# Altium PCB SensorRotacao.PcbDoc
Units mm, origin at the board's own origin, x right, y up, seen from the top; angles counter-clockwise.
Board outline 55 x 25 mm, 2 copper layers (Top Layer, Bottom Layer), stack 1.671 mm thick; 22 components, 8 nets, 46 pads, 7 vias.
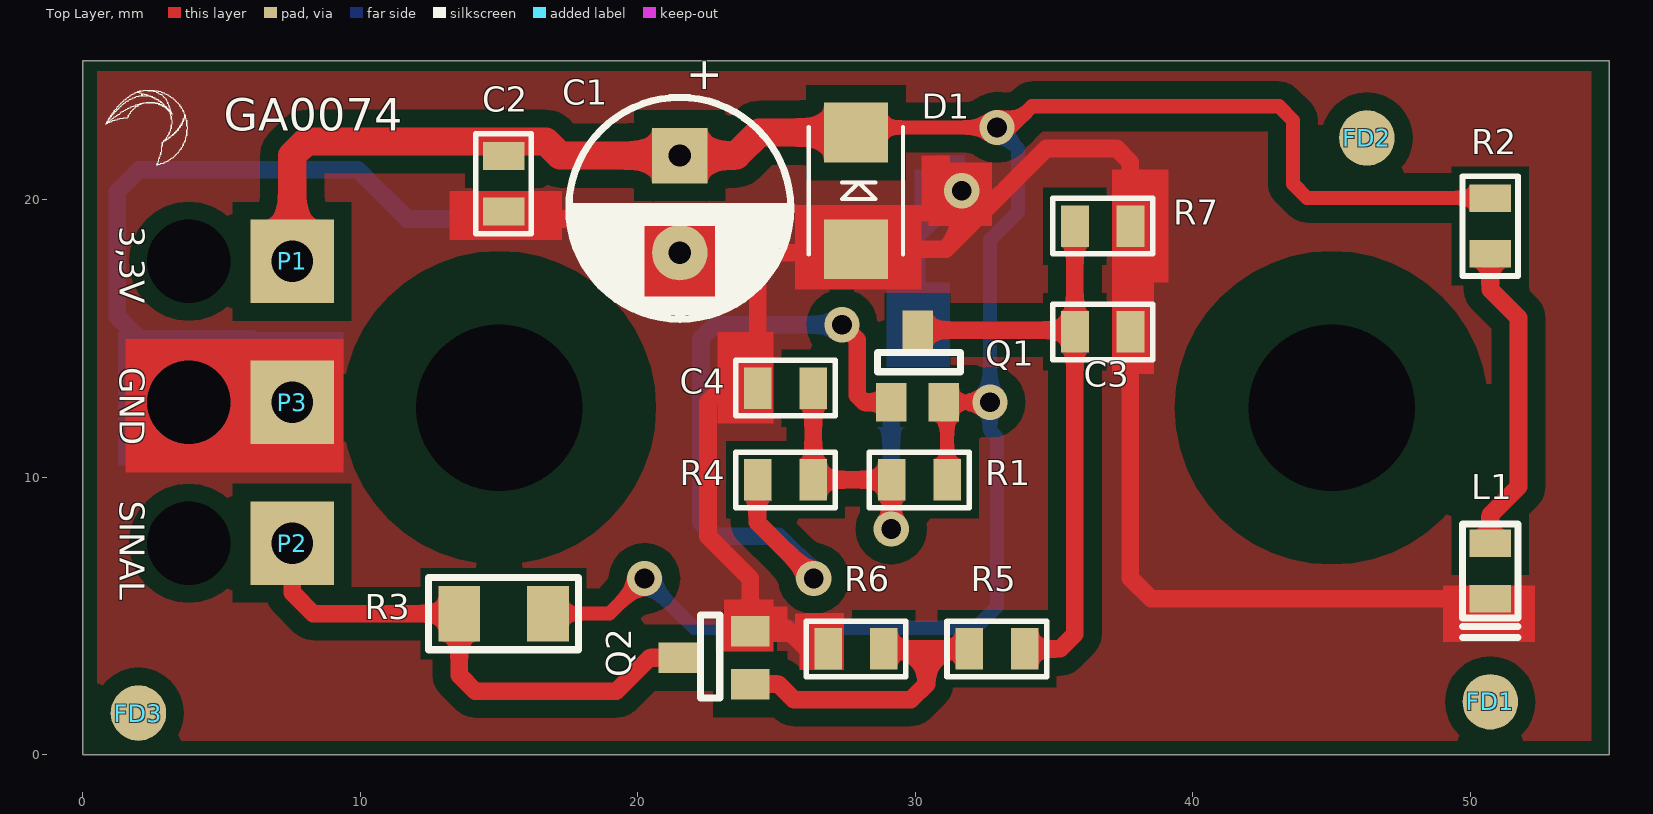
[diagram p0: Top Layer view]
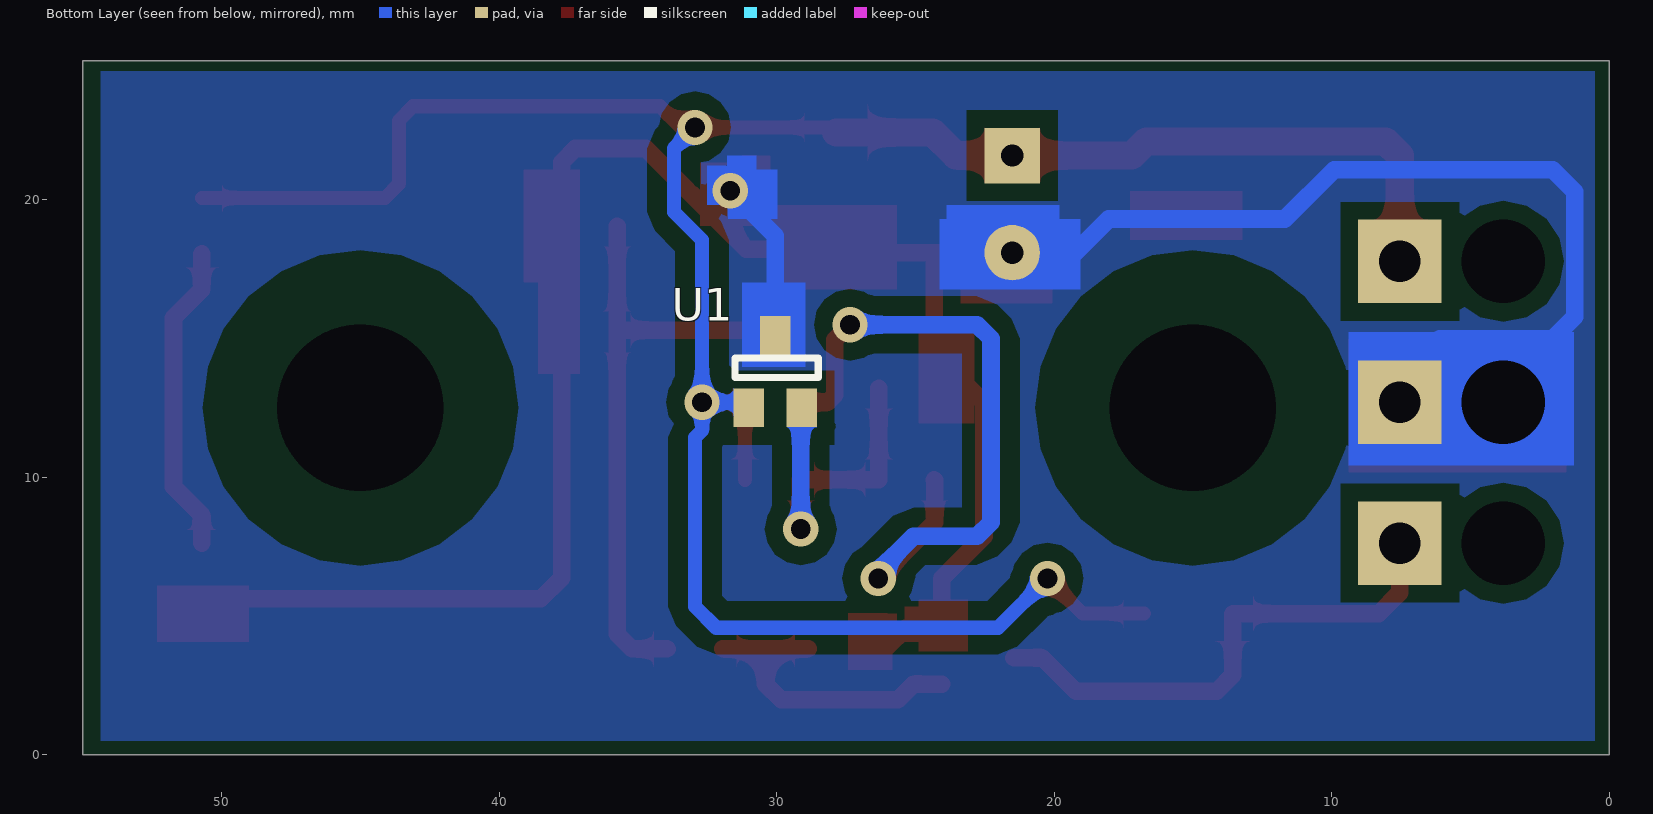
[diagram p1: Bottom Layer view, seen from below]
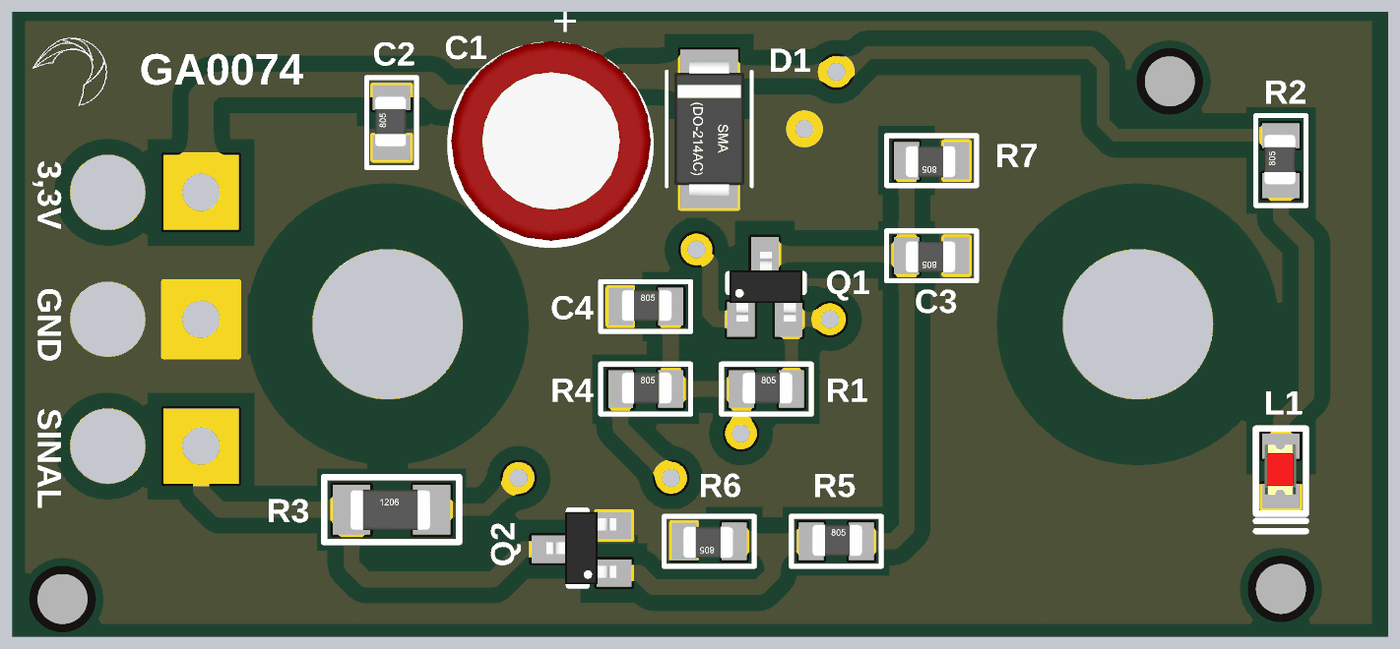
[diagram p2: 3D render of the assembled board from above, using the file's embedded part models]

## Layer stack, top to bottom
Top Solder: solder mask 0.0102, Solder Resist, Dk 3.5
Top Layer: signal copper 0.0356
Dielectric 1: dielectric 1.6, FR-4, Dk 4.8
Bottom Layer: signal copper 0.0356
Bottom Solder: solder mask 0.0102, Solder Resist, Dk 3.5

## Board outline
0,0 0,25 55,25 55,0

## Design rules (kind name [scope] priority, off if disabled: settings)
Clearance [InPolygon] p1: gap=0.635
Clearance Clearance_1 [All] p2: gap=0.762
PolygonConnect [All] p1: connectstyle=Relief reliefconductorwidth=0.254 reliefentries=4 polygonreliefangle="90 Angle" airgapwidth=0.254
RoutingVias [All] p1: holewidth=0.711 width=1.27 viastyle="Through Hole" minholewidth=0.711 minwidth=1.27 maxholewidth=0.711 maxwidth=1.27
SolderMaskExpansion [All] p1: expansion=0.102
UnpouredPolygon [All] p1: allowunpoured=FALSE
Width [All] p1: maxlimit=2.54 minlimit=0.254 preferedwidth=0.508
29 further rules are at their usual default settings.

## Components (designator, comment, footprint, x,y, rotation, side; value= is the part's Value field where it differs from the comment)
C1 "100uF/50V" "CAP POL 8x12mm" 21.51,21.59 r270 top
C2 "100nF/50V-0805" "0805-REVISADO ONDA" 15.16,20.574 r90 top
C3 "470nF/50V-0805" "0805-REVISADO ONDA" 36.75,15.24 r180 top
C4 "100nF/50V-0805" "0805-REVISADO ONDA" 25.32,13.208 r0 top
D1 "SMBJ5.0A" DO-214AA 27.86,20.32 r90 top
FD1 "FID" FIDUCIAL 50.72,1.905 r0 top
FD2 "FID" FIDUCIAL 46.275,22.225 r0 top
FD3 "FID" FIDUCIAL 2,1.5 r0 top
L1 "LED VERMELHO 0603 SMD" "LED 0805 - REVISADO ONDA" 50.72,7.62 r270 top
P1 "PAD" "PAD 3,5" 7.54,17.78 r180 top
P2 "PAD" "PAD 3,5" 7.54,7.62 r90 top
P3 "PAD" "PAD 3,5" 7.54,12.7 r90 top
Q1 "BC856L" "SOT23 - REVISADO ONDA" 29.13,12.7 r0 top
Q2 "BC846L" "SOT23 - REVISADO ONDA" 24.05,2.54 r90 top
R1 "10K-0805-5%" "0805-REVISADO ONDA" 30.146,9.906 r0 top
R2 "1K-0805-5%" "0805-REVISADO ONDA" 50.72,19.05 r90 top
R3 "220R-1206-5%" "1206-REVISADO ONDA" 15.16,5.08 r0 top
R4 "1K-0805-5%" "0805-REVISADO ONDA" 25.32,9.906 r0 top
R5 "1K-0805" "0805-REVISADO ONDA" 32.94,3.81 r0 top
R6 "100K-0805-5%" "0805-REVISADO ONDA" 27.86,3.81 r180 top
R7 "10K-0805-5%" "0805-REVISADO ONDA" 36.75,19.05 r180 top
U1 "A1120" "SOT23 - REVISADO ONDA" 31,12.5 r180 bottom

## Footprints (in the part's own frame and the unit in brackets; to place one, negate y for a bottom-side part, rotate by r counter-clockwise, add the part's x,y. Pads: shape width x height; smd on the part's side, far side on the other; paste and mask are expansions set on the pad)
"0805-REVISADO ONDA" [mm]
  rect 1x1.5 smd: 1(-1,0) 2(1,0)
  silkscreen extent -1.8,-1 1.8,1, body extent -0.96,-0.58 1.04,0.67, height 0.78
"1206-REVISADO ONDA" [mm]
  rect 1.5x2 smd: 1(-1.6,0) 2(1.6,0)
  silkscreen extent -2.7,-1.3 2.7,1.3, body extent -1.65,-0.81 1.55,0.79, height 1
"CAP POL 8x12mm" [mm]
  rect 2x2 hole 0.8: 1(0,0)
  round 2 hole 0.8: 2(3.5,0)
  silkscreen extent -2.1,-4 5.9,4, body extent -2.25,-3.97 5.75,4.03, height 12
DO-214AA [mm] "SMBJ LITTELFUSE"
  rect 2.15x2.3 smd: 1(-2.1,0) 2(2.1,0)
  silkscreen extent -2.3,-1.7 2.3,1.7, body extent -2.75,-1.4 2.75,1.4, height 2.6
FIDUCIAL [mm]
  round 2 smd: 1(0,0)
"LED 0805 - REVISADO ONDA" [mm]
  rect 1x1.5 smd: 1(0,0) 2(2,0)
  silkscreen extent -0.7,-1 3.4,1, body extent -0.07,-0.65 1.95,0.6, height 1.1
"PAD 3,5" [mm]
  rect 3x3 hole 1.5: 1(0,0)
"SOT23 - REVISADO ONDA" [mm]
  rect 1.1x1.4 smd: 1(0,0) 2(1.9,0) 3(0.95,2.6)
  silkscreen extent -0.5,1.1 2.5,1.8, body extent -0.45,-0.1 2.45,2.7, height 1.3

## Part data
C2 C4: library part 100nF/50-0805-NPO
C3: library part 100nF/50-0805-NPO, "100nF/50V-0805"
FD1 FD2 FD3: library part FIDUCIAL
Q2: library part BC846
R3 R5 R6: library part 10K-0805-5%, "10K-0805-5%"

## Free pads (board coordinates)
  round 0 hole 3: ""(3.81,7.62) ""(3.81,12.7) ""(3.81,17.78)
  round 0 hole 6: ""(15,12.5) ""(45,12.5)

## Via types
v1: diameter 1.27, hole 0.711, Top Layer to Bottom Layer, 7 vias

## Nets (pads, with @x,y where several pads share a name; then routed paths per layer and width w, separated by ;. In a path a pad name is that pad's centre, name@x,y a point inside that pad or via, vN(x,y) a via of type N, cw(c..) or ccw(c..) an arc to the next point about the centre after c; other vN are vias at no path point)
3,3V: C1.1 C2.2 D1.2 P1.1 Q1.2 R1.2 R2.2 R3.2 U1.1 | length 93
  Top Layer w0.508: R3.2 18.97,5.08 v1(20.24,6.35) ; D1.2 28.046,22.606 v1(32.94,22.606) 33.448,22.606 34.21,23.368 43.1,23.368 43.608,22.86 43.608,20.574 44.116,20.066 R2.2@50.704,20.066 ; R1.2 31.146,12.584 Q1.2 v1(32.686,12.7)
  Top Layer w1.016: P1.1 7.54,21.59 8.048,22.098 16.684,22.098 17.192,21.59 C1.1 23.542,21.59 24.372,22.42 D1.2
  Bottom Layer w0.508: v1(20.24,6.35) 22.018,4.572 32.178,4.572 32.94,5.334 32.94,11.43 32.686,11.684 v1(32.686,12.7) ; U1.1 31.2,12.7 v1(32.686,12.7) ; v1(32.94,22.606) 33.702,21.844 33.702,19.558 32.686,18.542 v1(32.686,12.7)
GND: C1.2 C2.1 C3.1 C4.1 D1.1 L1.2 P3.1 pad.@3.81,12.7 Q2.2 R6.2 R7.1 U1.3 | length 115.8
  Top Layer w0.635: P3.1 7.905,12.7 P3.1@8.81,13.606 ; C2.1 15.43,19.304 18.034,19.304 19.248,18.09 C1.2 D1.1@28.064,18.09 ; 24.32,18.018 C4.1 23.034,13.208 22.526,12.7 22.526,7.874 24.05,6.35 Q2.2 24.182,4.572 25.32,4.572 26.082,3.81 R6.2 ; D1.1 31.094,18.22 31.67,18.796 ; v1(31.67,20.32) 31.67,18.796 ; L1.2 38.496,5.62 37.75,6.366 C3.1 R7.1 37.75,21.352 37.258,21.844 34.718,21.844 31.67,18.796
  Bottom Layer w0.635: P3.1 7.54,13.542 6.096,14.986 2.032,14.986 1.231,15.787 1.231,20.281 2.032,21.082 9.906,21.082 11.684,19.304 18.034,19.304 19.248,18.09 C1.2 ; U1.3 30.05,18.7 v1(31.67,20.32)
NetC3_2: C3.2 Q1.3 R5.2 R7.2 | length 22.4
  Top Layer w0.635: Q1.3 C3.2@35.69,15.3 ; R5.2 35.226,3.81 35.75,4.334 C3.2 R7.2
NetC4_2: C4.2 R1.1 R4.2 U1.2 | length 12.3
  Top Layer w0.635: C4.2 R4.2 R1.1 29.146,8.144 v1(29.13,8.128)
  Bottom Layer w0.635: v1(29.13,8.128) U1.2@29.13,12.47
NetL1_1: L1.1 R2.1 | length 11.3
  Top Layer w0.635: L1.1 50.72,8.636 51.736,9.652 51.736,15.748 50.72,16.764 R2.1
NetP2_1: P2.1 Q2.3 R3.1 | length 19
  Top Layer w0.635: P2.1 7.54,5.842 8.302,5.08 R3.1 13.56,2.87 14.144,2.286 19.224,2.286 20.428,3.49 Q2.3
NetQ1_1: Q1.1 R4.1 | length 25.8
  Top Layer w0.635: R4.1 24.304,9.89 24.304,8.382 v1(26.336,6.35) ; v1(27.352,15.494) 27.9,14.947 27.9,12.954 28.154,12.7 Q1.1
  Bottom Layer w0.635: v1(26.336,6.35) 26.59,6.35 25.066,7.874 22.78,7.874 22.272,8.382 22.272,14.986 22.78,15.494 v1(27.352,15.494)
NetQ2_1: Q2.1 R5.1 R6.1 | length 11.2
  Top Layer w0.635: Q2.1 25.066,2.54 25.626,1.981 29.841,1.981 30.4,2.54 30.4,3.81 ; R6.1 30.4,3.81 ; R5.1 30.4,3.81
pads on no net: FD1.1 FD2.1 FD3.1

## Polygon pours and split planes (outlines as drawn)
GND on Top Layer "Bottom Layer-No Net" (solid, remove dead copper, pour order 3): 0.508,0.508 0.508,24.638 13.716,24.638 54.356,24.638 54.356,0.508
GND on Bottom Layer "Bottom Layer-No Net" (solid, remove dead copper, pour order 5): 0.508,0.508 0.508,24.638 13.462,24.638 54.356,24.638 54.356,0.508

## Other copper
Top Layer:
  rectangle net GND: 1.524,10.16 9.398,14.986
  rectangle net GND: 26.004,3.048 27.432,5.113
  rectangle net GND: 25.828,3.048 27.432,4.064
  rectangle net GND: 25.828,3.302 27.178,4.064
  rectangle net GND: 25.654,3.81 26.67,5.08
  rectangle net GND: 24.638,4.064 25.385,5.334
  rectangle net GND: 23.096,3.725 24.892,5.588
  rectangle net GND: 13.208,18.542 17.272,20.32
  rectangle net GND: 49.022,4.064 52.324,6.096
  rectangle net GND: 22.86,11.938 24.892,15.24
  rectangle net GND: 30.48,19.05 32.766,21.336
  rectangle net GND: 30.226,19.216 31.253,21.59
  rectangle net GND: 37.084,17.018 39.116,21.082
  rectangle net GND: 37.084,13.716 38.608,17.018
  rectangle net GND: 25.654,16.764 30.226,19.812
  rectangle net GND: 20.066,16.256 23.368,19.558
Bottom Layer:
  rectangle net GND: 19.812,18.034 23.876,19.812
  rectangle net GND: 19.05,16.764 24.13,19.304
  rectangle net GND: 31.543,20.828 32.512,21.23
  rectangle net GND: 30.734,20.447 31.797,21.59
  rectangle net GND: 29.972,19.304 31.75,21.082
  rectangle net GND: 30.226,19.812 32.512,20.828
  rectangle net GND: 30.226,20.574 32.512,21.082
  rectangle net GND: 28.956,13.97 31.242,17.018
  rectangle net GND: 1.27,10.414 9.398,15.24

## Silkscreen, mask and mechanical layers (free items; w line width, h text height)
Top Overlay:
  drawing of 405 lines, arcs and shapes, not listed
  text "GA0074" at 5.08,22.098 h2
  text "3,3V" at 1.016,19.05 h1.52 r270
  text "GND" at 1.016,13.97 h1.52 r270
  text "SINAL" at 1.016,9.144 h1.52 r270
Mechanical 1:
  the board outline again, w0.254

## Text inside footprints (layer, text, board x,y; h text height)
C1: Top Overlay "+" at 21.51,25.146 h2 r270